# Altium PCB counter_using_CD4026BE.PcbDoc
Units mm, origin at the board's own origin, x right, y up, seen from the top; angles counter-clockwise.
Board outline 69.22 x 62.15 mm, 2 copper layers (Top Layer, Bottom Layer); 15 components, 31 nets, 96 pads, 11 vias.
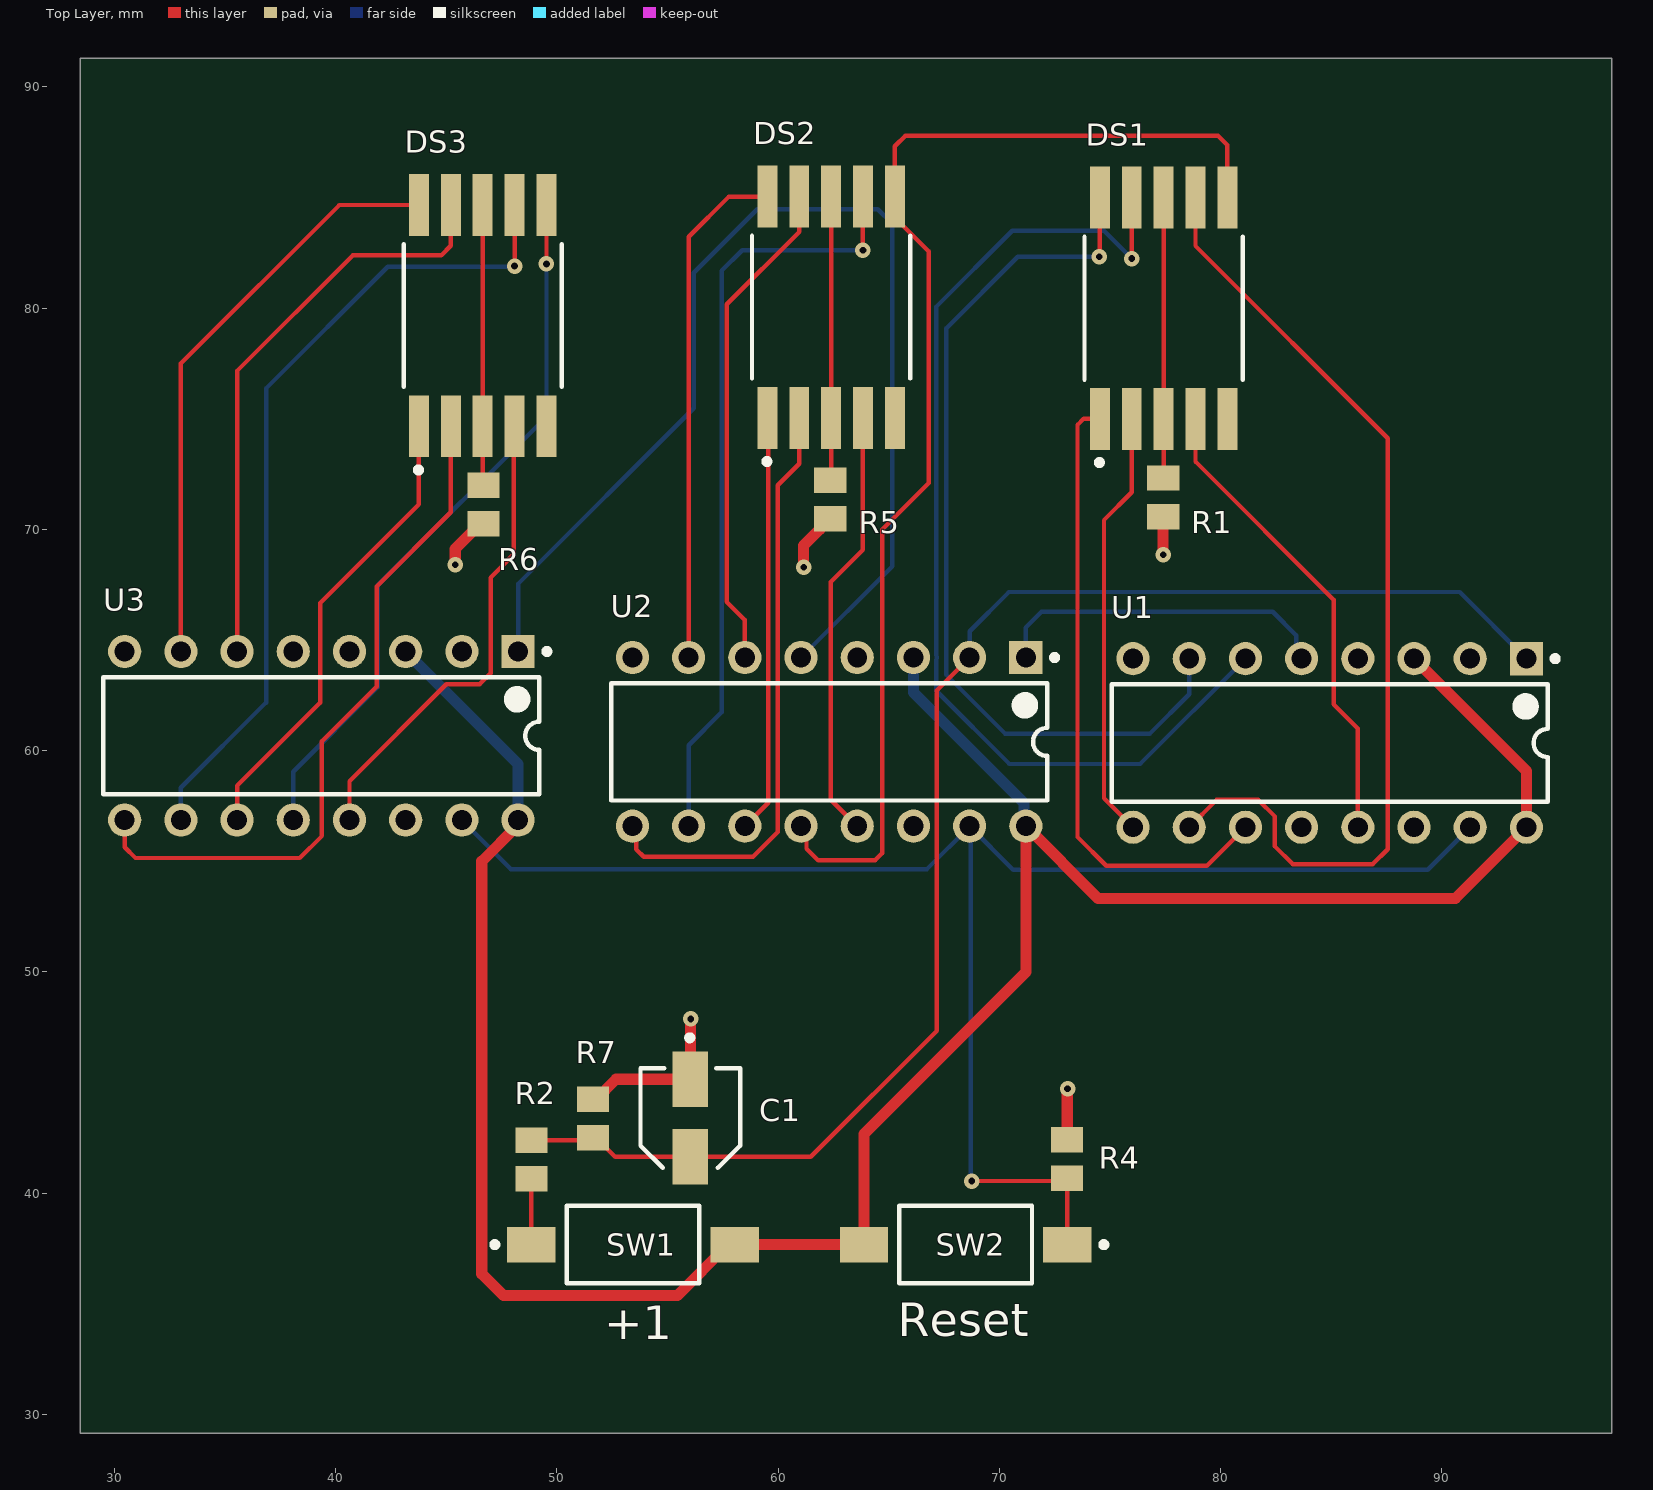
[diagram p0: Top Layer view]
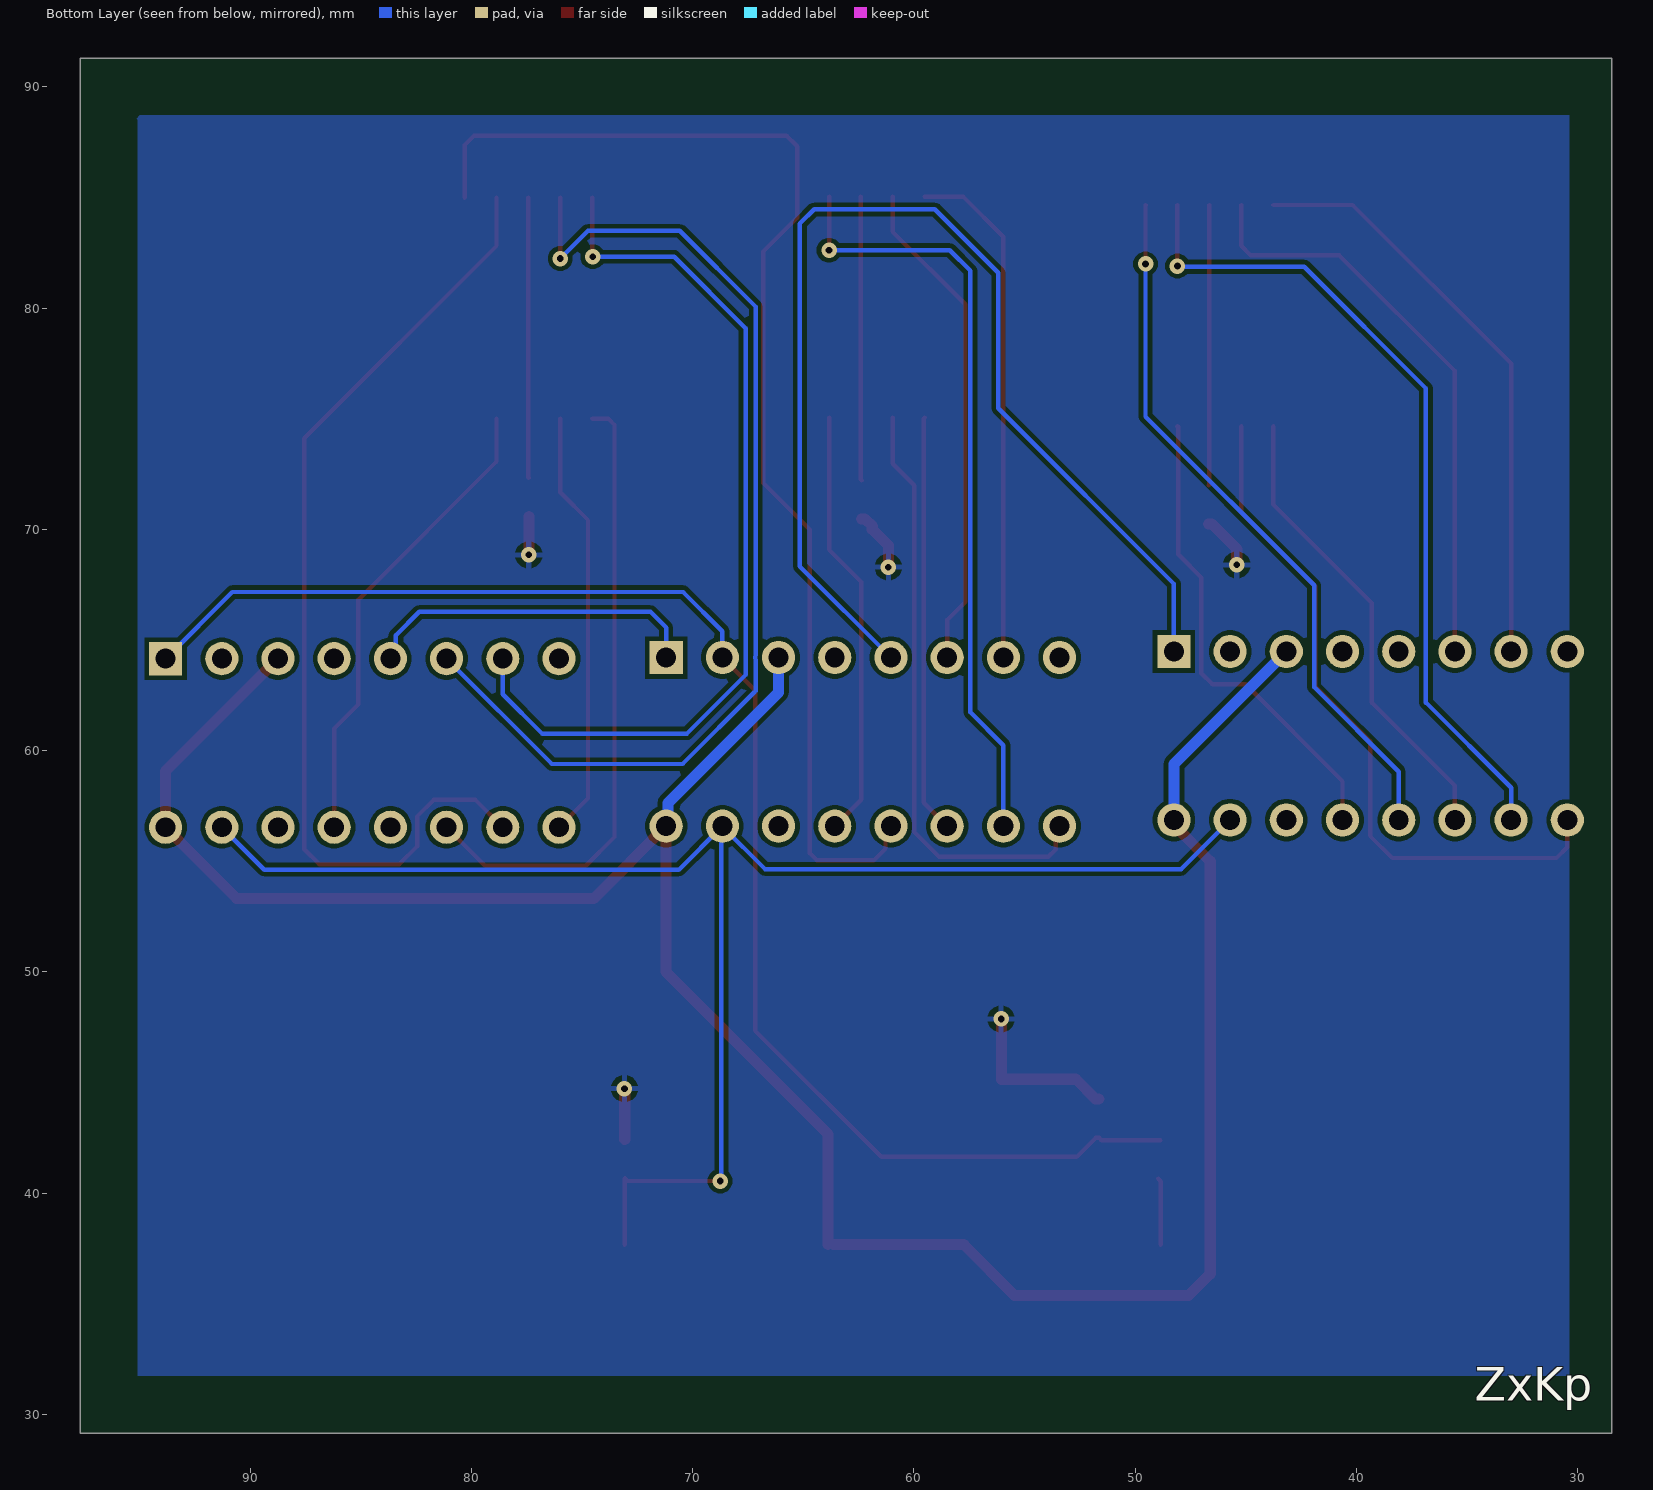
[diagram p1: Bottom Layer view, seen from below]

## Layer stack, top to bottom
Top Solder: solder mask 0.0102, Solder Resist, Dk 3.5
Top Layer: signal copper 0.0356
Dielectric 1: dielectric 0.32, FR-4, Dk 4.8
Bottom Layer: signal copper 0.0356
Bottom Solder: solder mask 0.0102, Solder Resist, Dk 3.5

## Board outline
28.45,29.15 28.45,91.3 97.65,91.3 97.675,91.275 97.675,29.15

## Design rules (kind name [scope] priority, off if disabled: settings)
Clearance [All] p1: gap=0.2 ignorepadtopadclearanceinfootprint=FALSE
PolygonConnect [All] p1: connectstyle=Relief reliefconductorwidth=0.254 reliefentries=4 polygonreliefangle="90 Angle" airgapwidth=0.254
RoutingVias [All] p1: holewidth=0.3 width=0.7 viastyle="Through Hole" minholewidth=0.3 minwidth=0.7 maxholewidth=0.3 maxwidth=0.7
SolderMaskExpansion [All] p1: expansion=0.102 istentingtop=FALSE
SupplyNets "Schematic Supply Nets_2" [InNet('GND')] p1: voltage=0.000
SupplyNets "Schematic Supply Nets_1" [InNet('+9')] p2: voltage=0.000
Width [All] p1: maxlimit=1 minlimit=0.2 preferedwidth=0.2
30 further rules are at their usual default settings.

## Components (designator, comment, footprint, x,y, rotation, side; value= is the part's Value field where it differs from the comment)
C1 "1uF" FP-FCB-MFG 56.025,43.4 r270 top
DS1 "ACSC02-41SURKWA-F01" FP-ACSC02-41SURKWA-F01-MFG 77.418,80 r90 top
DS2 "ACSC02-41SURKWA-F01" FP-ACSC02-41SURKWA-F01-MFG 62.389,80.047 r90 top
DS3 "ACSC02-41SURKWA-F01" FP-ACSC02-41SURKWA-F01-MFG 46.641,79.666 r90 top
R1 "220" RESC2013X70X40NL20T20 77.4,71.45 r90 top
R2 "3k" RESC2013X70X40NL20T20 48.85,41.525 r90 top
R4 "39k" RESC2013X70X40NL20T20 73.05,41.55 r270 top
R5 "220" RESC2013X70X40NL20T20 62.35,71.35 r270 top
R6 "220" RESC2013X70X40NL20T20 46.675,71.125 r270 top
R7 "22k" RESC2013X70X40NL20T20 51.625,43.375 r270 top
SW1 "FSMSM" TECO-FSMSM-2_V 53.435,37.677 r0 top
SW2 "FSMSM" TECO-FSMSM-2_V 68.47,37.675 r180 top
U1 "CD4026BE" N0016A 84.925,60.35 r270 top
U2 "CD4026BE" N0016A 62.3,60.4 r270 top
U3 "CD4026BE" N0016A 39.35,60.675 r270 top

## Footprints (in the part's own frame and the unit in brackets; to place one, negate y for a bottom-side part, rotate by r counter-clockwise, add the part's x,y. Pads: shape width x height; smd on the part's side, far side on the other; paste and mask are expansions set on the pad)
FP-ACSC02-41SURKWA-F01-MFG [mm]
  rect 2.8x0.9 smd paste+0 mask+0: 1(-5,2.88) 2(-5,1.44) 3(-5,0) 4(-5,-1.44) 5(-5,-2.88) 6(5,-2.88) 7(5,-1.44) 8(5,0) 9(5,1.44) 10(5,2.88)
  silkscreen extent -7.1,-3.57 3.22,3.57, body extent -6.5,-3.67 6.5,3.67, height 0.25
FP-FCB-MFG [mm]
  rect 2.5x1.6 smd paste+0 mask+0: 1(-1.75,0) 2(1.75,0)
  silkscreen extent -3.75,-2.25 2.25,2.25, body extent -3.25,-2.5 3.25,2.5, height 0.25
N0016A [mm] "DIP, 16-Leads, Body 19.7x6.6mm, Pitch 2.54mm"
  rect 1.5x1.5 hole 0.9: 1(-3.81,8.89)
  round 1.5 hole 0.9: 2(-3.81,6.35) 3(-3.81,3.81) 4(-3.81,1.27) 5(-3.81,-1.27) 6(-3.81,-3.81) 7(-3.81,-6.35) 8(-3.81,-8.89) 9(3.81,-8.89) 10(3.81,-6.35) 11(3.81,-3.81) 12(3.81,-1.27) 13(3.81,1.27) 14(3.81,3.81) 15(3.81,6.35) 16(3.81,8.89)
  silkscreen extent -3.93,-9.85 2.65,10.32, body extent -3.95,-9.85 3.95,9.85, height 5.08
RESC2013X70X40NL20T20 [mm] "Chip Resistor, 2-Leads, Body 2.00x1.25mm, IPC Medium Density"
  rect 1.15x1.45 smd: 1(-0.875,0) 2(0.875,0)
  body extent -1.1,-0.72 1.1,0.72, height 0.7
TECO-FSMSM-2_V [mm] "SMD, 2-Leads, Body 6x3.5mm, Pitch 9.19mm"
  rect 2.2x1.6 smd: 1(-4.595,0)
  rect 2.18x1.6 smd: 2(4.595,0)
  silkscreen extent -6.37,-1.75 3,1.75, body extent -4.98,-1.75 4.98,1.75, height 4.4

## Part data
C1: library part CMP-00287-05440591-1, "EEEFC1H1R0R Aluminum Electrolytic Capacitor, 1 uF, 50 V, ± 20%, 1000 hours @ 105°C, Radial Can - SMD", Capacitance=1µF, Case/Package=Radial, Dielectric Material=Aluminium, ESR (Equivalent Series Resistance)=5Ω, Leakage Current=3µA, Max Operating Temperature=105°C, Min Operating Temperature=-40°C, Ripple Current=30mA, Tolerance=20%, Voltage=50V, Contact Plating=Tin, Diameter=4mm, Height=5.4mm, Height - Seated (Max)=5.4102mm, Impedance=5Ω, Lead Free="Lead Free", Lead Length=1.8mm, Lead Pitch=1mm, Length=5.5mm, Life (Hours)=1000hours, Lifecycle Status=Production, Material=Aluminium, Mount="PCB, Surface Mount", NexarPartId=5440591, Number of Pins=2, Packaging="Cut Tape", Radiation Hardening=No, REACH SVHC="No SVHC", Ripple Current (AC)=30mA, RoHS=Compliant, Schedule B="8532220020, 8532220020", Termination=SMD/SMT, Voltage Rating=50V, Voltage Rating (AC)=50V, Voltage Rating (DC)=50V, Width=4.3mm
DS1 DS2 DS3: library part CMP-44525-000002-1, "DISPLAY 7-SEG 0.2\" SGL RED 10SMD", Case/Package=SMD/SMT, Color=Red, Forward Current=30mA, Forward Voltage=1.95V, Max Operating Temperature=85°C, Max Power Dissipation=75mW, Min Operating Temperature=-40°C, Package Quantity=650, Test Current=20mA, Element Configuration="Common Cathode", Height=0.315inch, Illumination Color=Red, Lead Free="Lead Free", Luminous Intensity=30mcd, Number of Characters=1, Operating Supply Voltage=1.95V, Packaging="Tape and Reel", Power Consumption=75mW, Wavelength=630nm, Width=0.272inch
R1 R2 R4 R5 R6 R7: library part CMP-2001-00044-1, Manufacturer=Panasonic, Part Number=ERJ6ENF2200V
SW1 SW2: library part CMP-2000-07511-1, "FSMSM Push Button Switch, 50 mA, -35 to 85 degC, 2-Pin SMD, RoHS, Bulk", Case\/Package=SMD/SMT, Contact Current Rating=50mA, Contact Resistance=100mOhm, Manufacturer="TE Connectivity", Max Operating Temperature=85degC, Max Voltage Rating (DC)=12V, Min Operating Temperature=-35degC, Operating Force=180gf, Package Description="2-Pin Surface Mount Device, Body 6 x 3.5 mm, Pitch 9.19 mm", Package Quantity=1000, Voltage Rating (DC)=24V, Actuator Length=1.07mm, Actuator Material=Polyamide, Contact Material=Brass, Contact Plating=Silver, Current Rating=50mA, Datasheet URL=http://www.te.com/commerce/DocumentDelivery/DDEController?Action=showdoc&DocId=Customer+Drawing%7F1437566-3%7FC2%7Fpdf%7FEnglish%7FENG_CD_1437566-3_C2_1437566_3_1_c.dwg.pdf%7F1437566-3, Datasheet Version="Rev. C2, 08/2014", Electrical Life=20000Cycles, ELV=Compliant, Illumination Type=Illuminated, Lead Free=LeadFree, Manufacturer URL=http://www.te.com/, Mechanical Life=20000Cycles, Mount=SurfaceMount, Mounting Technology=SurfaceMount, Orientation=Straight, Package Reference=FSMSM, Packaging=LoosePiece, REACH SVHC=Unknown, RoHSCompliant=true, Switch Travel=0.25mm, Termination=GullWing, Throw Configuration=SPST
U1 U2 U3: library part CMP-1623-00561-2, "CMOS Decade Counter/Divider with Decoded 7-Segment Display Outputs and Display Enable, N0016A, TUBE", F @ Nom Voltage(Max)(Mhz)=8, Generic Part Number=CD4026B, ICC @ Nom Voltage(Max)(mA)=0.03, Manufacturer="Texas Instruments", Operating Temperature Range(C)="-55 to 125", Rating=Catalog, tpd @ Nom Voltage(Max)(ns)=250, Voltage(Nom)(V)=5,10,15, Bits(#)=7, Code_JEDEC=MS-001, DatasheetVersion=SCHS031B, Function=Counter, Input Type=CMOS, Inputs=1, Output Drive (IOL/IOH)(Max)(mA)=1.5/-1.5, Output Type=CMOS, PackageReference=N0016A, Schmitt Trigger=No, Technology Family=CD4000, Type=Decade, VCC(Max)(V)=18, VCC(Min)(V)=3

## Via types
v1: diameter 0.7, hole 0.3, Top Layer to Bottom Layer, 11 vias

## Nets (pads, with @x,y where several pads share a name; then routed paths per layer and width w, separated by ;. In a path a pad name is that pad's centre, name@x,y a point inside that pad or via, vN(x,y) a via of type N, cw(c..) or ccw(c..) an arc to the next point about the centre after c; other vN are vias at no path point)
1: U1.5 U2.1 | length 15.5
  Bottom Layer w0.2: U2.1 71.19,65.565 71.9,66.275 82.35,66.275 83.415,65.21 83.415,64.4 U1.5
2: U2.5 U3.1 | length 52.2
  Bottom Layer w0.2: U3.1 48.24,67.54 56.175,75.475 56.175,81.6 59.047,84.472 64.503,84.472 65.15,83.825 65.15,68.33 U2.5
+9: SW1.2 SW2.2 U1.3 U1.16 U2.3 U2.16 U3.3 U3.16 | length 116
  Top Layer w0.5: U3.16 48.24,56.644 46.6,55.004 46.6,36.35 47.575,35.375 55.438,35.375 57.74,37.677 SW1.2 SW2.2@63.628,37.677 ; SW2.2 63.875,42.675 71.19,49.99 U2.16 74.455,53.325 90.6,53.325 U1.16 93.815,59.08 U1.3
  Bottom Layer w0.5: U3.3 48.24,59.405 U3.16 ; U2.3 66.11,62.64 71.114,57.636 71.114,56.666 U2.16
A1: DS1.7 U1.10 | length 44.8
  Top Layer w0.2: U1.10 79.81,57.775 81.7,57.775 82.45,57.025 82.45,55.675 83.25,54.875 86.875,54.875 87.55,55.55 87.55,74.125 78.858,82.817 DS1.7
A2: DS2.7 U2.10 | length 34.9
  Top Layer w0.2: DS2.7 v1(63.829,82.621) v1@63.85,82.6
  Bottom Layer w0.2: U2.10 55.95,60.25 57.44,61.74 57.44,81.69 58.371,82.621 v1(63.829,82.621)
A3: DS3.7 U3.10 | length 37.4
  Top Layer w0.2: v1(48.081,81.906) DS3.7
  Bottom Layer w0.2: U3.10 33,58.325 36.85,62.175 36.85,76.375 42.35,81.875 48.05,81.875 v1(48.081,81.906)
B1: U1.12
B2: DS1.6 DS2.6 U2.12 | length 56.1
  Top Layer w0.2: U2.12 61.279,56.341 61.279,55.571 61.8,55.05 64.375,55.05 64.7,55.375 64.7,70 66.8,72.1 66.8,82.566 65.269,84.097 DS2.6 65.269,87.319 65.75,87.8 79.875,87.8 80.298,87.377 DS1.6
B3: DS3.6 U3.12 | length 32.5
  Top Layer w0.2: DS3.6 49.525,84.662 v1(49.525,82)
  Bottom Layer w0.2: U3.12 38.08,59.055 41.9,62.875 41.9,67.475 49.525,75.1 v1(49.525,82)
C1: DS1.4 U1.13 | length 21.5
  Top Layer w0.2: DS1.4 78.858,73.067 85.1,66.825 85.1,62.1 86.195,61.005 U1.13
C2: DS2.4 U2.13 | length 19.6
  Top Layer w0.2: U2.13 62.375,57.785 62.375,67.625 63.829,69.079 DS2.4
C3: DS3.4 U3.13 | length 21.8
  Top Layer w0.2: U3.13 40.62,58.62 45,63 46.5,63 47,63.5 47,67.825 48.05,68.875 48.05,74.635 DS3.4
CAP1: C1.2 R2.2 R7.2 U1.1 U2.2 | length 66.9
  Top Layer w0.2: R2.2 51.525,42.4 R7.2 51.775,42.5 52.625,41.65 C1.2 61.475,41.65 67.16,47.335 67.16,62.72 U2.2
  Bottom Layer w0.2: U2.2 68.65,65.4 70.425,67.175 90.8,67.175 U1.1
D1: DS1.2 U1.9 | length 19.5
  Top Layer w0.2: DS1.2 75.978,71.678 74.725,70.425 74.725,57.85 U1.9
D2: DS2.2 U2.9 | length 27.2
  Top Layer w0.2: U2.9 53.585,56.415 53.585,55.54 53.917,55.208 58.858,55.208 59.975,56.325 59.975,72 60.949,72.974 DS2.2
D3: DS3.2 U3.9 | length 31.7
  Top Layer w0.2: U3.9 30.46,55.64 30.95,55.15 38.375,55.15 39.375,56.15 39.375,60.425 41.85,62.9 41.85,67.425 45.201,70.776 DS3.2
E1: DS1.1 U1.11 | length 28.6
  Top Layer w0.2: DS1.1 73.8,75 73.525,74.725 73.525,56.1 74.825,54.8 79.375,54.8 U1.11
E2: DS2.1 U2.11 | length 18.9
  Top Layer w0.2: U2.11 59.55,57.65 59.55,75.006 DS2.1
E3: DS3.1 U3.11 | length 21.2
  Top Layer w0.2: U3.11 35.54,58.415 39.3,62.175 39.3,66.675 43.761,71.136 DS3.1
F1: DS1.9 U1.6 | length 48.2
  Top Layer w0.2: v1(75.978,82.247) DS1.9
  Bottom Layer w0.2: v1(75.978,82.247) 74.725,83.5 70.575,83.5 67.15,80.075 67.15,64.355 cw(c66.11,64.21) 67.15,64.065 67.15,62.7 67.209,62.641 70.45,59.4 76.355,59.4 U1.6
F2: DS2.9 U2.6 | length 22.5
  Top Layer w0.2: U2.6 58.49,65.91 57.675,66.725 57.675,80.175 60.949,83.449 DS2.9
F3: DS3.9 U3.6 | length 26.5
  Top Layer w0.2: U3.6 35.54,77.165 40.775,82.4 44.775,82.4 45.201,82.826 DS3.9
G1: DS1.10 U1.7 | length 41.1
  Top Layer w0.2: v1@74.475,82.3 v1(74.507,82.332) 74.538,82.363 DS1.10
  Bottom Layer w0.2: v1(74.507,82.332) 70.832,82.332 67.6,79.1 67.6,63.425 70.25,60.775 76.8,60.775 78.575,62.55 U1.7
G2: DS2.10 U2.7 | length 23.3
  Top Layer w0.2: U2.7 55.95,83.225 57.772,85.047 DS2.10
G3: DS3.10 U3.7 | length 26.7
  Top Layer w0.2: U3.7 33,77.5 40.166,84.666 DS3.10
GND: C1.1 R1.1 R4.1 R5.2 R6.2 R7.1 | length 16.8
  Top Layer w0.5: v1(45.4,68.4) 45.4,69.125 46.525,70.25 R6.2 ; R7.1 51.775,44.25 52.675,45.15 C1.1 56.025,47.85 v1(56.05,47.875) ; v1(61.15,68.3) 61.15,69.275 61.875,70 61.875,70.15 62.2,70.475 R5.2 ; R4.1 73.063,42.437 73.063,44.713 v1(73.075,44.725) ; v1@77.375,68.825 v1(77.4,68.85) R1.1
NetDS1_3: DS1.3 DS1.8 R1.2 | length 12.7
  Top Layer w0.2: R1.2 77.418,72.343 DS1.3 DS1.8
NetDS2_3: DS2.3 DS2.8 R5.1 | length 12.8
  Top Layer w0.2: R5.1 62.389,72.264 DS2.3 DS2.8
NetDS3_3: DS3.3 DS3.8 R6.1 | length 12.7
  Top Layer w0.2: DS3.8 DS3.3 46.641,72.034 R6.1
NetR2_1: R2.1 SW1.1 | length 3
  Top Layer w0.2: SW1.1 48.84,40.54 R2.1@48.95,40.65
R1: R4.2 SW2.1 U1.15 U2.15 U3.15 | length 72.3
  Top Layer w0.2: v1(68.75,40.55) 72.925,40.55 R4.2 73.065,40.66 SW2.1
  Bottom Layer w0.2: U3.15 47.915,54.65 66.725,54.65 U2.15@68.65,56.575 ; v1(68.75,40.55) 68.7,40.6 68.7,56.525 U2.15@68.65,56.575 ; U1.15 89.36,54.625 70.615,54.625 U2.15 U2.15@68.65,56.575
pads on no net: DS1.5 DS2.5 DS3.5 U1.2 U1.4 U1.8 U1.14 U2.4 U2.8 U2.14 U3.2 U3.4 U3.5 U3.8 U3.14

## Polygon pours and split planes (outlines as drawn)
GND on Bottom Layer "GND_L02_P000" (solid, pour order 0): 30.375,31.75 30.375,88.725 94.975,88.725 95.125,88.575 95.075,88.525 95.075,31.75

## Silkscreen, mask and mechanical layers (free items; w line width, h text height)
Top Overlay:
  text "Reset" at 65.404,33.529 h1.52
  text "+1" at 52.129,33.404 h1.52
Bottom Overlay:
  text "ZxKp" at 34.646,30.612 h1.52
Mechanical 1:
  the board outline again, w0.254